# Altium PCB 电子钟v1.PcbDoc
Units mil, origin at the board's own origin, x right, y up, seen from the top; angles counter-clockwise.
Board outline 4440 x 3545 mil, 2 copper layers (Top Layer, Bottom Layer); 29 components, 52 nets, 185 pads, 3 vias.
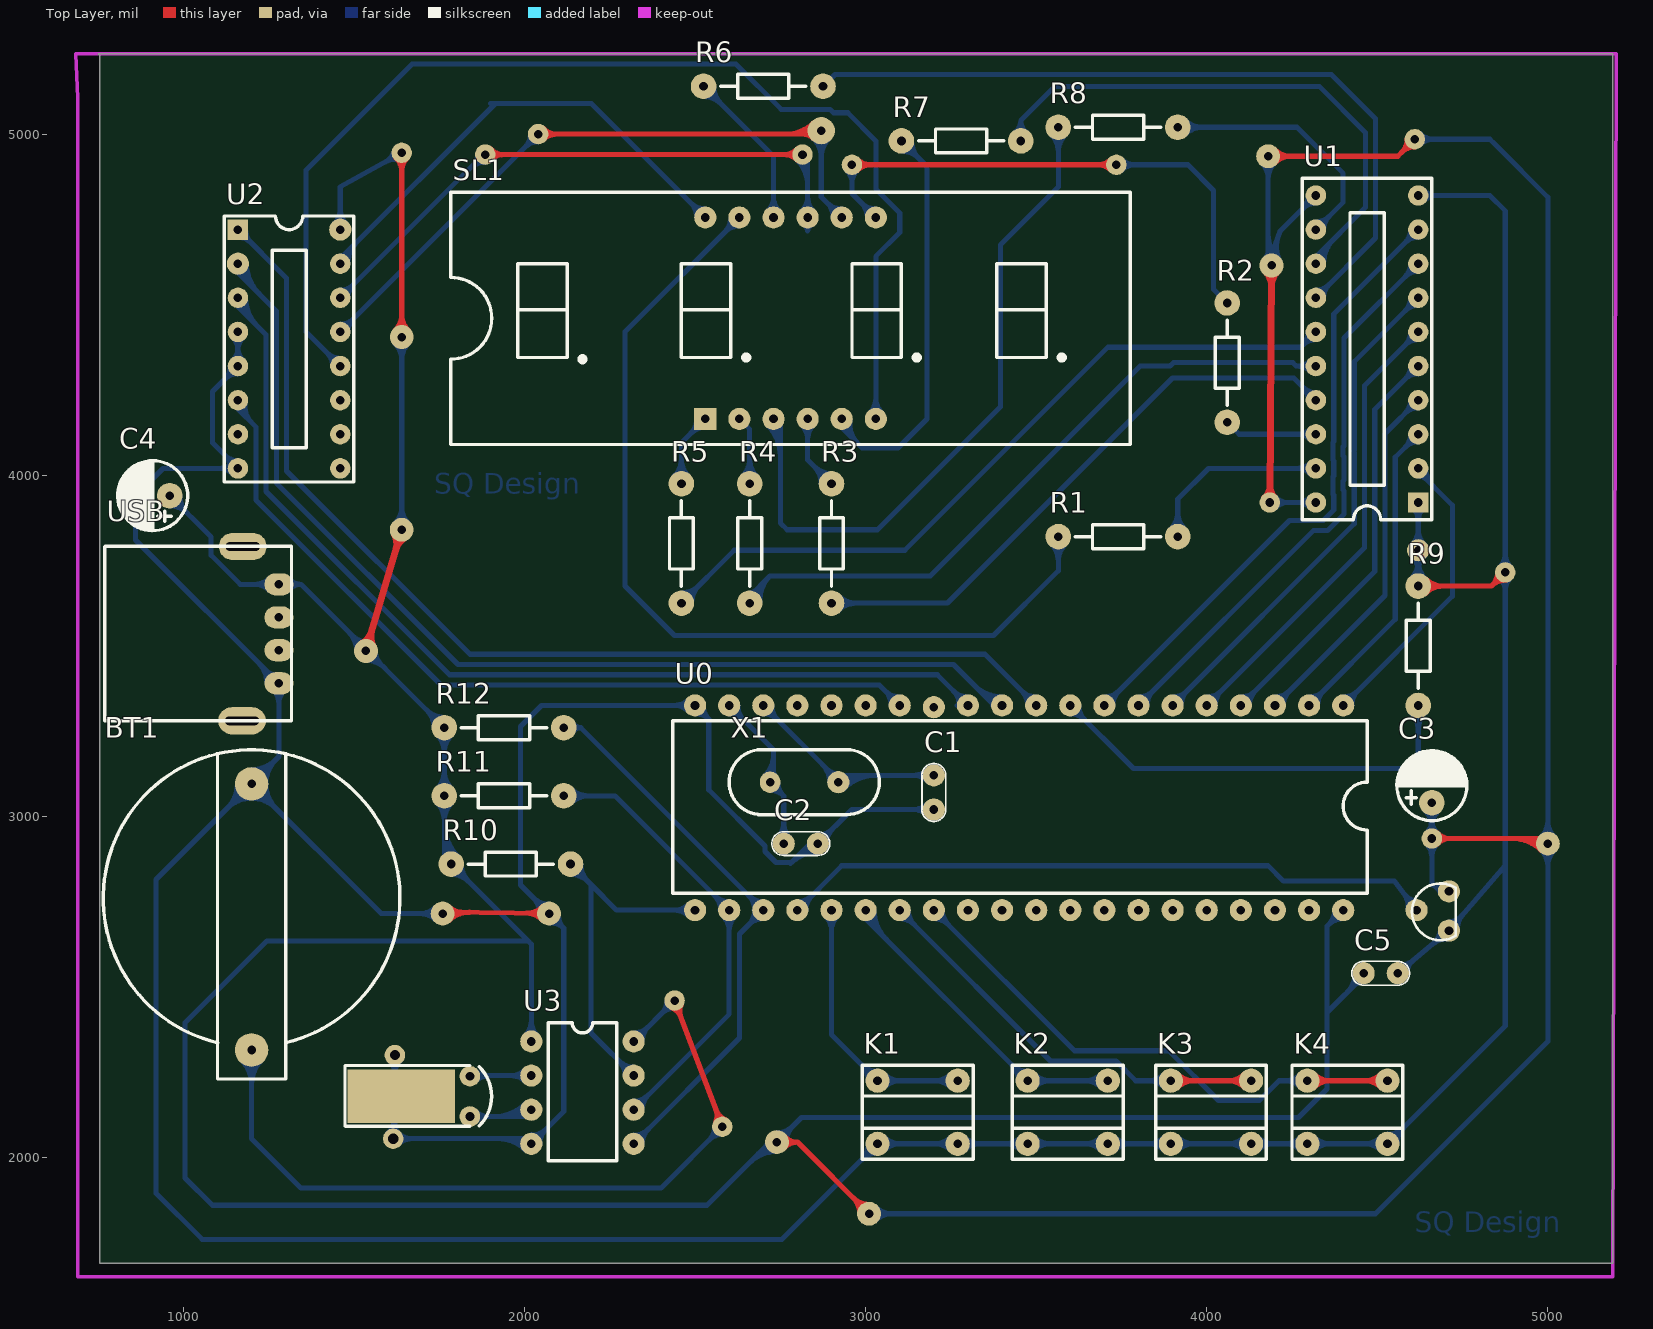
[diagram p0: Top Layer view]
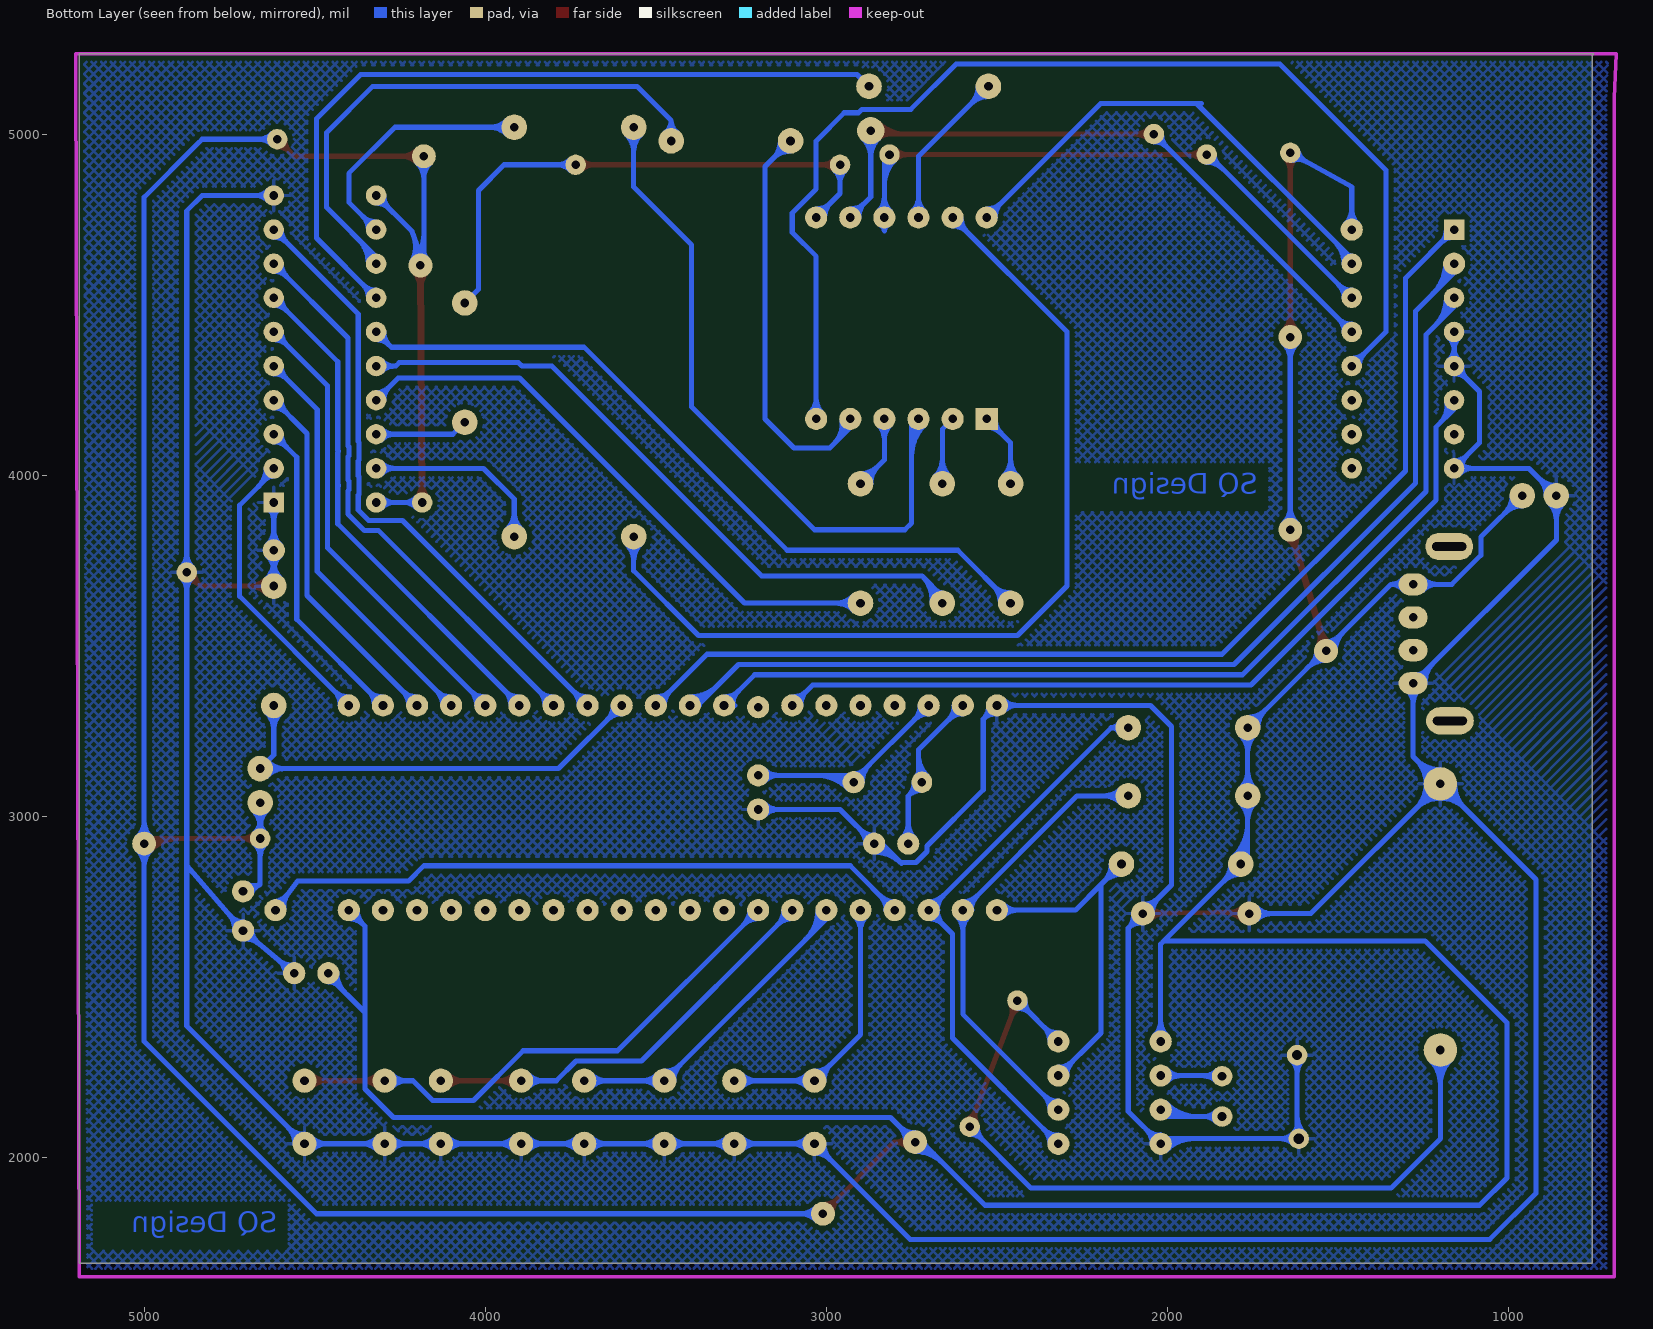
[diagram p1: Bottom Layer view, seen from below]

## Layer stack, top to bottom
Top Layer: signal copper 1.4
Dielectric: dielectric 12.6, FR-4, Dk 4.8
Bottom Layer: signal copper 1.4

## Board outline
750,5235 755,5230 755,1690 5190,1690 5190,5235 750,5235

## Design rules (kind name [scope] priority, off if disabled: settings)
Clearance [All] p1: gap=15
PolygonConnect [All] p1: connectstyle=Relief reliefconductorwidth=10 reliefentries=4 polygonreliefangle="90 Angle"
RoutingLayers [All] p1: top layer_v5=FALSE bottom layer_v5=TRUE
RoutingVias [All] p1: holewidth=28 width=50 viastyle="Through Hole" minholewidth=28 minwidth=50 maxholewidth=28 maxwidth=50
SilkscreenOverComponentPads [All] p1: minsilkscreentomaskgap=10
SolderMaskExpansion [All] p1: expansion=4
Width [All] p1: maxlimit=25 minlimit=8 preferedwidth=20
26 further rules are at their usual default settings.

## Components (designator, comment, footprint, x,y, rotation, side; value= is the part's Value field where it differs from the comment)
BT1 "3V" DCH_22 1200,2760 r270 top
C1 "47pf" 瓷片电容 3200,3020 r90 top
C2 "C" 瓷片电容 2860,2920 r180 top
C3 "CD" 电解电容（小型） 4660,3040 r90 top
C4 "CD" 电解电容（小型） 960,3940 r180 top
C5 "C" 瓷片电容 4560,2540 r180 top
K1 "switch-anniu" 6*6按钮开关 3150,2130 r0 top
K2 "switch-anniu" 6*6按钮开关 3590,2130 r0 top
K3 "switch-anniu" 6*6按钮开关 4010,2130 r0 top
K4 "switch-anniu" 6*6按钮开关 4410,2130 r0 top
R1 "R" 电阻-0.25W 3740,3820 r180 top
R2 "R" 电阻-0.25W 4060,4330 r90 top
R3 "R" 电阻-0.25W 2900,3800 r90 top
R4 "R" 电阻-0.25W 2660,3800 r90 top
R5 "R" 电阻-0.25W 2460,3800 r90 top
R6 "R" 电阻-0.25W 2700,5140 r180 top
R7 "R" 电阻-0.25W 3280,4980 r180 top
R8 "R" 电阻-0.25W 3740,5020 r180 top
R9 "R" 电阻-0.25W 4620,3500 r270 top
R10 "R" 电阻-0.25W 1960,2860 r180 top
R11 "R" 电阻-0.25W 1940,3060 r180 top
R12 "R" 电阻-0.25W 1940,3260 r180 top
SL1 "SMG(4Bit_A)" 4位数码管（19*50mm） 2780,4460 r0 top
U0 "MCU_51" DIP-40 4400,3325 r270 top
U1 "74HC573" DIP20插座 4620,3920 r180 top
U2 "74HC138" DIP16插座 1160,4720 r0 top
U3 "DS1302" DIP-8 2020,2340 r0 top
USB "USB" USB阴头 1280,3680 r180 top
X1 "XTAL" 无源晶体（2个脚） 2720,3100 r0 top

## Footprints (in the part's own frame and the unit in brackets; to place one, negate y for a bottom-side part, rotate by r counter-clockwise, add the part's x,y. Pads: shape width x height; smd on the part's side, far side on the other; paste and mask are expansions set on the pad)
4位数码管（19*50mm） [mil]
  rect 65x65 hole 25.37: 1(-250,-295)
  round 65 hole 25.37: 2(-150,-295) 3(-50,-295) 4(50,-295) 5(150,-295) 6(250,-295) 7(250,295.55) 8(150,295.55) 9(50,295.55) 10(-50,295.55) 11(-150,295.55) 12(-250,295.55)
  silkscreen extent -996,-370 996,370
6*6按钮开关 [mil]
  round 70.87 hole 25.24: 1(-115,95) 1(120,95) 2(-115,-90) 2(120,-90)
  silkscreen extent -160,-135 165,140
DCH_22 [mm]
  round 2.5 hole 0.644: 1(11.303,0) 2(-8.509,0)
  silkscreen extent -11.05,-11.05 13.46,11.05
DIP16插座 [mil]
  rect 60x60 hole 25: 1(0,0)
  round 65 hole 25: 2(0,-100) 16(300,0)
  round 60 hole 25: 3(0,-200) 4(0,-300) 5(0,-400) 6(0,-500) 7(0,-600) 8(0,-700) 9(300,-700) 10(300,-600) 11(300,-500) 12(300,-400) 13(300,-300) 14(300,-200) 15(300,-100)
  silkscreen extent -40,-740 340,40
DIP20插座 [mil]
  rect 60x60 hole 25: 1(0,0)
  round 60 hole 25: 2(0,-100) 3(0,-200) 4(0,-300) 5(0,-400) 6(0,-500) 7(0,-600) 8(0,-700) 9(0,-800) 10(0,-900) 11(300,-900) 12(300,-800) 13(300,-700) 14(300,-600) 15(300,-500) 16(300,-400) 17(300,-300) 18(300,-200) 19(300,-100) 20(300,0)
  silkscreen extent -40,-950 340,50
DIP-8 [mil]
  round 65 hole 25.43: 1(0,0) 2(0,-100) 3(0,-200) 4(0,-300) 5(300,-300) 6(300,-200) 7(300,-100) 8(300,0)
  silkscreen extent 50,-350 250,55
DIP-40 [mil]
  round 65 hole 25.43 paste+0: 1(0,0) 2(0,-100) 3(0,-200) 4(0,-300) 5(0,-400) 6(0,-500) 7(0,-600) 8(0,-700) 9(0,-800) 10(0,-900) 11(0,-1000) 12(0,-1100) 13(5,-1200) 14(0,-1300) 15(0,-1400) 16(0,-1500) 17(0,-1600) 18(0,-1700) 19(0,-1800) 20(0,-1900) 21(600,-1900) 22(600,-1800) 23(600,-1700) 24(600,-1600) 25(600,-1500) 26(600,-1400) 27(600,-1300) 28(600,-1200) 29(600,-1100) 30(600,-1000) 31(600,-900) 32(600,-800) 33(600,-700) 34(600,-600) 35(600,-500) 36(600,-400) 37(600,-300) 38(600,-200) 39(600,-100) 40(600,0)
  silkscreen extent 45,-1965 550,70
USB阴头 [mil]
  oval 140x80 hole 25 slot 100 at 0 deg: 0(106,-111) 0(108,400)
  oval 85x65 hole 25: 1(0,0) 2(0,97) 3(0,193) 4(0,290)
  silkscreen extent -37,-112 510,400
无源晶体（2个脚） [mil]
  oval 60.63x62.99 hole 25.5: 1(0,0)
  round 65 hole 25.5: 2(200,0)
  silkscreen extent -120,-95 320,95
瓷片电容 [mil]
  round 65 hole 25.5: 1(0,0) 2(100,0)
  silkscreen extent -35,-35 135,35
电解电容（小型） [mil]
  round 75 hole 25.37: 1(0,0) 2(100,0)
  silkscreen extent -52,-103 152,103
电阻-0.25W [mil]
  round 75 hole 25.5: 1(-175,0) 2(175,0)
  silkscreen extent -125,-35 125,35

## Part data
BT1: library part BATTER
C1: library part C

## Free pads (board coordinates)
  round 60 hole 30: 0(1620,2300) 1(1615,2055)
  round 60.24 hole 25.59: 1(1840,2120) 2(1840,2238.11)
  round 60 hole 25: 1(2040,5000) 3(2815,4940) 4(1885,4940) 6(3735,4910) 7(2960,4910) 10(1640,4945) 12(2580,2090) 13(2440,2460) 16(4875,3715) 18(4185,3920) 26(4610,4985) 31(4660,2935)
  oval 65.12x65.18 hole 25.5: 1(4710,2665) 2(4615,2725) 3(4710,2780)
  round 80 hole 25: 2(2870,5010)
  round 70 hole 25: 11(1640,3840) 20(1760,2715) 21(2072.03,2715) 24(2740,2045) 25(3010,1835) 29(4180,4935) 30(5000,2920)
  round 65 hole 25: 14(4620,3780)
  rect 314.96x157.48 smd: GND(1639.21,2179.05)

## Via types
v1: diameter 70, hole 25, Top Layer to Bottom Layer, 3 vias

## Nets (pads, with @x,y where several pads share a name; then routed paths per layer and width w, separated by ;. In a path a pad name is that pad's centre, name@x,y a point inside that pad or via, vN(x,y) a via of type N, cw(c..) or ccw(c..) an arc to the next point about the centre after c; other vN are vias at no path point)
GND: BT1.2 C1.1 C2.1 C4.2 C5.1 K1.2 K2.2 K3.2 K4.2 pad.0 pad.1@1615,2055 pad.1@4710,2665 pad.14 pad.16 pad.20 pad.21 R9.1 U0.20 U1.1 U1.10 U2.4 U2.5 U2.8 U3.4 USB.4 | length 21799.6
  Top Layer w15: pad.20@1765,2720 pad.21 ; pad.20@1768.69,2706.02 cw(c1801.75,2671.87) 1802.52,2719.39 ; pad.20@1779.13,2695.24 cw(c1837.37,2635.07) 1838.73,2718.8 ; pad.20@1779.76,2734.13 ccw(c1815,2768.24) 1814.2,2719.2 ; pad.21@2052.27,2695.87 ccw(c2004.56,2649.7) 2005.65,2716.08 ccw(c2006.73,2782.46) pad.21@2052.9,2734.76 ; R9.1 4835,3675 pad.16 ; R9.1@4641.21,3653.79 cw(c4692.43,3602.57) 4692.43,3675 cw(c4692.43,3747.43) R9.1@4641.21,3696.21 ; pad.16@4852.5,3715 cw(c4798.18,3715) 4836.59,3676.59 cw(c4875,3638.18) pad.16@4875,3692.5
  Bottom Layer w15: C4.2@838.79,3918.79 cw(c787.57,3867.57) 860,3867.57 cw(c932.43,3867.57) C4.2@881.21,3918.79 ; C4.2@860,3970 ccw(c860,4042.43) 911.21,3991.21 ccw(c962.43,3940) C4.2@890,3940 ; U2.8@1137.5,4020 ccw(c1083.18,4020) 1121.59,4058.41 ccw(c1160,4096.82) U2.8@1160,4042.5 ; U2.5@1137.5,4320 cw(c1083.18,4320) 1121.59,4281.59 cw(c1160,4243.18) U2.5@1160,4297.5 ; U2.8@1144.09,4004.09 ccw(c1105.68,3965.68) 1105.68,4020 ccw(c1105.68,4074.32) U2.8@1144.09,4035.91 ; U2.5@1144.09,4335.91 ccw(c1105.68,4374.32) 1160,4374.32 ccw(c1214.32,4374.32) U2.5@1175.91,4335.91 ; U2.4@1144.09,4404.09 cw(c1105.68,4365.68) 1160,4365.68 cw(c1214.32,4365.68) U2.4@1175.91,4404.09 ; BT1.2@1158.29,3095 cw(c1057.58,3095) 1128.79,3023.79 cw(c1200,2952.58) 1200,3053.29 cw(c1200,2952.58) 1271.21,3023.79 cw(c1342.42,3095) 1241.71,3095 cw(c1342.42,3095) 1271.21,3166.21 cw(c1200,3237.42) BT1.2@1200,3136.71 ; U2.4 U2.5 1085,4245 1085,4095 U2.8 940,4020 C4.2 860,3810 USB.4 1280,3175 BT1.2 ; BT1.2@1173.29,3095 cw(c1108.8,3095) 1154.4,3049.4 cw(c1200,3003.8) 1200,3068.29 cw(c1200,3003.8) 1245.6,3049.4 cw(c1291.2,3095) 1226.71,3095 cw(c1291.2,3095) 1245.6,3140.6 cw(c1200,3186.2) BT1.2@1200,3121.71 ; 1220.25,3449.75 cw(c1160.5,3390) USB.4@1245,3390 ; 1244.39,3425.61 ccw(c1270,3451.21) USB.4@1270,3415 ; 1245.86,3424.14 cw(c1211.72,3390) USB.4@1260,3390 ; USB.4@1262.32,3372.32 cw(c1219.64,3329.64) 1280,3329.64 cw(c1340.36,3329.64) USB.4@1297.68,3372.32 ; pad.1@1599.09,2070.91 ccw(c1548.61,2121.39) 1620,2121.39 ; pad.0@1604.09,2284.09 cw(c1565.68,2245.68) 1620,2245.68 cw(c1674.32,2245.68) pad.0@1635.91,2284.09 ; pad.1@1609.7,2060.3 ccw(c1584.82,2085.18) 1620,2085.18 ; 1620,2097.25 ccw(c1657.25,2097.25) 1630.91,2070.91 ccw(c1669.32,2109.32) 1669.32,2055 ccw(c1669.32,2000.68) pad.1@1630.91,2039.09 ; pad.0 1620,2060 1615,2055 2005,2055 U3.4 ; pad.20@1740.55,2695.55 ccw(c1693.61,2648.61) 1693.61,2715 ccw(c1693.61,2781.39) pad.20@1740.55,2734.45 ; pad.20 1580,2715 BT1.2 ; 1923.43,2055 cw(c1923.43,1943.43) U3.4@2002.32,2022.32 ; 1959.64,2055 cw(c1959.64,1979.64) U3.4@2012.93,2032.93 ; U3.4@2020,2065 ccw(c2020,2125.36) 2062.68,2082.68 ccw(c2105.36,2040) U3.4@2045,2040 ; U3.4@2020,2066.42 U3.4 ; pad.21@2044.53,2715 ccw(c1978.14,2715) 2025.08,2761.95 ccw(c2072.03,2808.89) pad.21@2072.03,2742.5 ; pad.21@2073.8,2687.56 cw(c2077.24,2634.28) 2115,2672.03 ; pad.21@2099.47,2713.23 ccw(c2152.75,2709.78) 2115,2672.03 ; U0.20@2482.32,3307.32 ccw(c2439.64,3264.64) 2439.64,3325 ccw(c2439.64,3385.36) U0.20@2482.32,3342.68 ; U0.20@2501.17,3300.03 cw(c2503.59,3248.59) 2540,3285 ; U0.20@2524.97,3323.83 ccw(c2576.41,3321.41) 2540,3285 ; 2779.39,2861.61 cw(c2860,2781) C2.1@2860,2895 ; 2805,2887.22 cw(c2860,2832.22) C2.1@2860,2910 ; C2.1@2860,2945 ccw(c2860,3005.36) 2902.68,2962.68 ccw(c2945.36,2920) C2.1@2885,2920 ; K1.2@3007.07,2040 cw(c2939.63,2040) 2987.32,1992.32 cw(c3035,1944.63) K1.2@3035,2012.07 ; K1.2@3054.75,2020.25 cw(c3102.44,1972.56) 3102.44,2040 cw(c3102.44,2107.44) K1.2@3054.75,2059.75 ; C1.1@3182.32,3002.32 ccw(c3139.64,2959.64) 3139.64,3020 ccw(c3139.64,3080.36) C1.1@3182.32,3037.68 ; C1.1 2960,3020 C2.1 2837.78,2920 2782.78,2865 2737.22,2865 2705,2897.22 2705,2912.78 2540,3077.78 2540,3285 ; K1.2@3250.25,2020.25 ccw(c3202.56,1972.56) 3202.56,2040 ccw(c3202.56,2107.44) K1.2@3250.25,2059.75 ; K1.2@3289.75,2020.25 cw(c3337.44,1972.56) 3337.44,2040 cw(c3337.44,2107.44) K1.2@3289.75,2059.75 ; K2.2@3455.25,2020.25 ccw(c3407.56,1972.56) 3407.56,2040 ccw(c3407.56,2107.44) K2.2@3455.25,2059.75 ; K2.2@3494.75,2020.25 cw(c3542.44,1972.56) 3542.44,2040 cw(c3542.44,2107.44) K2.2@3494.75,2059.75 ; K2.2@3690.25,2020.25 ccw(c3642.56,1972.56) 3642.56,2040 ccw(c3642.56,2107.44) K2.2@3690.25,2059.75 ; K2.2@3729.75,2020.25 cw(c3777.44,1972.56) 3777.44,2040 cw(c3777.44,2107.44) K2.2@3729.75,2059.75 ; K3.2@3875.25,2020.25 ccw(c3827.56,1972.56) 3827.56,2040 ccw(c3827.56,2107.44) K3.2@3875.25,2059.75 ; K3.2@3914.75,2020.25 cw(c3962.44,1972.56) 3962.44,2040 cw(c3962.44,2107.44) K3.2@3914.75,2059.75 ; K3.2@4110.25,2020.25 ccw(c4062.56,1972.56) 4062.56,2040 ccw(c4062.56,2107.44) K3.2@4110.25,2059.75 ; K3.2@4149.75,2020.25 cw(c4197.44,1972.56) 4197.44,2040 cw(c4197.44,2107.44) K3.2@4149.75,2059.75 ; K4.2@4275.25,2020.25 ccw(c4227.56,1972.56) 4227.56,2040 ccw(c4227.56,2107.44) K4.2@4275.25,2059.75 ; K4.2@4314.75,2020.25 cw(c4362.44,1972.56) 4362.44,2040 cw(c4362.44,2107.44) K4.2@4314.75,2059.75 ; K4.2@4510.25,2020.25 ccw(c4462.56,1972.56) 4462.56,2040 ccw(c4462.56,2107.44) K4.2@4510.25,2059.75 ; K4.2@4530,2067.93 ccw(c4530,2135.37) 4577.68,2087.68 ccw(c4625.37,2040) K4.2@4557.93,2040 ; C5.1@4555,2535 C5.1 4710,2665 4875,2855 ; C5.1@4562.26,2564.9 ccw(c4567.73,2625) 4606.37,2578.64 ccw(c4645,2532.27) C5.1@4584.9,2537.74 ; R9.1@4598.79,3696.21 ccw(c4547.57,3747.43) 4620,3747.43 ccw(c4692.43,3747.43) R9.1@4641.21,3696.21 ; pad.14@4602.32,3762.32 cw(c4559.64,3719.64) 4620,3719.64 cw(c4680.36,3719.64) pad.14@4637.68,3762.32 ; pad.14@4602.32,3797.68 ccw(c4559.64,3840.36) 4620,3840.36 ccw(c4680.36,3840.36) pad.14@4637.68,3797.68 ; U1.1@4604.09,3904.09 cw(c4565.68,3865.68) 4620,3865.68 cw(c4674.32,3865.68) U1.1@4635.91,3904.09 ; R9.1 U1.1 ; U1.10 4830,4820 4875,4775 pad.16 ; U1.10@4635.91,4804.09 cw(c4674.32,4765.68) 4674.32,4820 cw(c4674.32,4874.32) U1.10@4635.91,4835.91 ; 4663.46,2626.22 cw(c4702.25,2579.68) pad.1@4707.73,2640.01 ; 4663.55,2626.29 ccw(c4624.88,2672.71) pad.1@4685.04,2667.24 ; pad.1@4708.24,2690.03 ccw(c4703.98,2750.45) 4749.72,2710.73 ; pad.1@4735,2666.79 cw(c4795.28,2671.04) 4749.65,2710.66 ; pad.16@4859.09,3699.09 cw(c4820.68,3660.68) 4875,3660.68 cw(c4929.32,3660.68) pad.16@4890.91,3699.09 ; pad.16@4859.09,3730.91 ccw(c4820.68,3769.32) 4875,3769.32 ccw(c4929.32,3769.32) pad.16@4890.91,3730.91 ; pad.16@4875,3725.75 pad.16 ; BT1.2 920,2815 920,1895 1055,1760 2755,1760 3035,2040 3270,2040 3475,2040 3710,2040 3895,2040 4130,2040 4295,2040 4530,2040 4875,2385 4875,2855 ; U3.4 2115,2135 2115,2672.03 ; 2115,2672.03 pad.21 1988.51,2798.51 1988.51,3263.51 2050,3325 U0.20 2540,3285 ; 4875,2855 pad.16
NetBT1_1: BT1.1 pad.12 pad.13 U3.8 | length 3035.5
  Top Layer w15: pad.13@2430.75,2439.49 cw(c2408.42,2389.97) 2459.22,2409.2 cw(c2510.03,2428.42) pad.13@2460.51,2450.75 ; pad.13 pad.12 ; pad.12@2559.49,2099.25 ccw(c2509.97,2121.58) 2560.78,2140.8 ccw(c2611.58,2160.03) pad.12@2589.25,2110.51
  Bottom Layer w15: BT1.1@1170.5,2285.5 cw(c1099.3,2214.3) 1200,2214.3 cw(c1300.7,2214.3) BT1.1@1229.5,2285.5 ; BT1.1@1181.11,2296.11 cw(c1135.51,2250.51) 1200,2250.51 cw(c1264.49,2250.51) BT1.1@1218.89,2296.11 ; BT1.1 1200,2055 1345,1910 2400,1910 pad.12 ; U3.8 pad.13 ; U3.8@2320,2365 ccw(c2320,2425.36) 2362.68,2382.68 ccw(c2405.36,2340) U3.8@2345,2340 ; pad.13@2417.5,2460 cw(c2363.18,2460) 2401.59,2421.59 cw(c2440,2383.18) pad.13@2440,2437.5 ; pad.12@2557.5,2090 cw(c2503.18,2090) 2541.59,2051.59 cw(c2580,2013.18) pad.12@2580,2067.5
NetC1_2: C1.2 U0.18 X1.2 | length 1172.5
  Bottom Layer w15: U0.18@2700,3300 cw(c2700,3239.64) 2742.68,3282.32 cw(c2785.36,3325) U0.18@2725,3325 ; U0.18 X1.2@2922.5,3102.5 ; 2873.79,3151.21 cw(c2822.57,3100) X1.2@2895,3100 ; 2885.86,3139.14 ccw(c2920,3173.28) X1.2@2920,3125 ; 2899.39,3125.61 cw(c2873.79,3100) X1.2@2910,3100 ; X1.2@2916.46,3103.54 cw(c2956.21,3063.79) 2956.21,3120 ; X1.2 X1.2@2922.5,3102.5 ; X1.2@2927.07,3092.93 cw(c2992.43,3027.57) 2992.43,3120 ; X1.2@2930,3095 X1.2@2922.5,3102.5 ; X1.2@2930,3120 X1.2@2950,3100 ; X1.2@2937.68,3082.32 cw(c3028.64,2991.36) 3028.64,3120 ; C1.2@3182.32,3102.32 ccw(c3139.64,3059.64) 3139.64,3120 ccw(c3139.64,3180.36) C1.2@3182.32,3137.68 ; C1.2 2940,3120 X1.2@2922.5,3102.5
NetC2_2: C2.2 U0.19 X1.1 | length 879.1
  Bottom Layer w15: U0.19@2600,3300 cw(c2600,3239.64) 2642.68,3282.32 cw(c2685.36,3325) U0.19@2625,3325 ; U0.19 2730,3195 2730,3120 X1.1@2730,3100 ; X1.1@2703.87,3117.31 ccw(c2640.78,3180.4) 2730,3180.4 ; X1.1@2714.47,3106.71 ccw(c2676.99,3144.19) 2730,3144.19 ; X1.1 2760,3060 C2.2 ; X1.1@2720.15,3076 cw(c2720.53,3019.35) 2760.59,3059.41 ; 2730,3132.12 ccw(c2750.94,3132.12) X1.1@2736.13,3117.31 ; C2.2@2742.32,2937.68 ccw(c2699.64,2980.36) 2760,2980.36 ccw(c2820.36,2980.36) C2.2@2777.68,2937.68 ; X1.1@2742.81,3098.82 ccw(c2795.04,3098.82) 2758.11,3061.89
NetC3_2: C3.2 R9.2 U0.9 | length 1660.5
  Bottom Layer w15: U0.9@3600,3300 cw(c3600,3239.64) 3642.68,3282.32 cw(c3685.36,3325) U0.9@3625,3325 ; U0.9 3785,3140 C3.2 4620,3180 R9.2 ; R9.2@4598.79,3303.79 cw(c4547.57,3252.57) 4620,3252.57 cw(c4692.43,3252.57) R9.2@4641.21,3303.79 ; C3.2@4638.79,3118.79 ccw(c4587.57,3067.57) 4587.57,3140 ccw(c4587.57,3212.43) C3.2@4638.79,3161.21
NetR1_1: R1.1 U1.19 | length 766.4
  Bottom Layer w15: R1.1@3893.79,3841.21 ccw(c3842.57,3892.43) 3915,3892.43 ccw(c3987.43,3892.43) R1.1@3936.21,3841.21 ; R1.1 3915,3930 4005,4020 4230,4020 ; 4215,4020 4230,4020 ; U1.19@4304.09,4004.09 ccw(c4265.68,3965.68) 4265.68,4020 ccw(c4265.68,4074.32) U1.19@4304.09,4035.91 ; U1.19 4230,4020
NetR1_2: R1.2 SL1.11 | length 2936.6
  Bottom Layer w15: SL1.11@2605,4755.55 cw(c2544.64,4755.55) 2587.32,4712.87 cw(c2630,4670.2) SL1.11@2630,4730.55 ; SL1.11 2295,4420.55 2295,3675 2440,3530 3375,3530 3565,3720 R1.2 ; R1.2@3543.79,3798.79 cw(c3492.57,3747.57) 3565,3747.57 cw(c3637.43,3747.57) R1.2@3586.21,3798.79
NetR2_1: R2.1 U1.18 | length 359.8
  Bottom Layer w15: R2.1 4095,4120 U1.18 ; U1.18@4304.09,4104.09 ccw(c4265.68,4065.68) 4265.68,4120 ccw(c4265.68,4174.32) U1.18@4304.09,4135.91
NetR2_2: pad.6 pad.7 R2.2 SL1.7 | length 2072.2
  Top Layer w15: pad.7 pad.6 ; pad.7@2975.91,4894.09 cw(c3014.32,4855.68) 3014.32,4910 cw(c3014.32,4964.32) pad.7@2975.91,4925.91 ; pad.6@3719.09,4894.09 ccw(c3680.68,4855.68) 3680.68,4910 ccw(c3680.68,4964.32) pad.6@3719.09,4925.91
  Bottom Layer w15: pad.7@2944.09,4894.09 cw(c2905.68,4855.68) 2960,4855.68 cw(c3014.32,4855.68) pad.7@2975.91,4894.09 ; pad.7@2960,4925 2960,4825.55 SL1.7 ; SL1.7@3005,4755.55 ccw(c2944.64,4755.55) 2987.32,4798.23 ccw(c3030,4840.91) SL1.7@3030,4780.55 ; pad.6 3945,4910 4020,4835 4020,4545 R2.2 ; pad.6@3750.91,4894.09 cw(c3789.32,4855.68) 3789.32,4910 cw(c3789.32,4964.32) pad.6@3750.91,4925.91
NetR3_1: R3.1 U1.17 | length 1919.4
  Bottom Layer w15: R3.1 3240,3625 3900,4285 4255,4285 U1.17 ; R3.1@2921.21,3603.79 cw(c2972.43,3552.57) 2972.43,3625 cw(c2972.43,3697.43) R3.1@2921.21,3646.21 ; U1.17@4297.5,4220 ccw(c4243.18,4220) 4281.59,4258.41 ccw(c4320,4296.82) U1.17@4320,4242.5
NetR3_2: R3.2 SL1.4 | length 427.6
  Bottom Layer w15: SL1.4@2812.32,4147.32 cw(c2769.64,4104.64) 2830,4104.64 cw(c2890.36,4104.64) SL1.4@2847.68,4147.32 ; SL1.4 2830,4045 R3.2 ; R3.2@2870,3975 ccw(c2797.57,3975) 2848.79,4026.21 ccw(c2900,4077.43) R3.2@2900,4005
NetR4_1: R4.1 U1.16 | length 2219.7
  Bottom Layer w15: R4.1 2660,3645 2720,3705 ; R4.1@2660,3655 ccw(c2660,3679.14) 2677.07,3662.07 ; R4.1@2674.98,3625.8 cw(c2747.72,3629.7) 2696.21,3681.21 ; R4.1@2689.96,3626.61 cw(c2792.87,3632.12) 2720,3705 ; U1.16@4304.09,4304.09 ccw(c4265.68,4265.68) 4265.68,4320 ccw(c4265.68,4374.32) U1.16@4304.09,4335.91 ; U1.16 4262.43,4320 4252.43,4330 3902.57,4330 3892.57,4320 3805,4320 3190,3705 2720,3705
NetR4_2: R4.2 SL1.2 | length 316.2
  Bottom Layer w15: SL1.2 2660,4135 R4.2 ; R4.2@2638.79,3996.21 ccw(c2587.57,4047.43) 2660,4047.43 ccw(c2732.43,4047.43) R4.2@2681.21,3996.21
NetR5_1: R5.1 U1.15 | length 2388.4
  Bottom Layer w15: R5.1 2615,3780 3115,3780 3710,4375 4275,4375 U1.15 ; R5.1@2460,3655 ccw(c2460,3727.43) 2511.21,3676.21 ccw(c2562.43,3625) R5.1@2490,3625 ; U1.15@4297.5,4420 cw(c4243.18,4420) 4281.59,4381.59 cw(c4320,4343.18) U1.15@4320,4397.5
NetR5_2: R5.2 SL1.1 | length 437.6
  Bottom Layer w15: R5.2@2438.79,3996.21 ccw(c2387.57,4047.43) 2460,4047.43 ccw(c2532.43,4047.43) R5.2@2481.21,3996.21 ; R5.2 2460,4095 SL1.1 ; SL1.1@2505,4165 cw(c2444.64,4165) 2487.32,4122.32 cw(c2530,4079.64) SL1.1@2530,4140
  Bottom Layer w20: SL1.1 SL1.1@2530,4175
NetR6_1: R6.1 U1.14 | length 2371.2
  Bottom Layer w15: R6.1 2910,5175 4365,5175 4495,5045 4495,4695 U1.14 ; U1.14@4320,4542.5 ccw(c4320,4596.82) 4358.41,4558.41 ccw(c4396.82,4520) U1.14@4342.5,4520
NetR6_2: R6.2 SL1.10 | length 678.5
  Bottom Layer w15: R6.2@2525,5110 cw(c2525,5037.57) 2576.21,5088.79 cw(c2627.43,5140) R6.2@2555,5140 ; R6.2 2730,4935 SL1.10 SL1.10@2729.45,4755.55 ; SL1.10@2712.32,4773.23 ccw(c2669.64,4815.91) 2730,4815.91 ccw(c2790.36,4815.91) SL1.10@2747.68,4773.23
NetR7_1: R7.1 U1.13 | length 1841.7
  Bottom Layer w15: R7.1@3437,5004 ccw(c3410.01,5040) 3455,5040 ; R7.1 3455,5040 ; R7.1@3473,5004 cw(c3499.99,5040) 3455,5040 ; 3480,5065 3489.27,5074.27 ; U1.13 4320,4640 4465,4785 4465,5005 4330,5140 3555,5140 3489.27,5074.27 ; U1.13@4327.5,4620 cw(c4393.89,4620) 4346.95,4666.95 ; U1.13@4342.5,4620 cw(c4445.1,4620) 4372.55,4692.55 ; 3455,5040 3489.27,5074.27
NetR7_2: R7.2 SL1.5 | length 1424.7
  Bottom Layer w15: SL1.5 2930,4140 2990,4080 3095,4080 3180,4165 3180,4905 R7.2 ; SL1.5@2939.89,4163.54 ccw(c2997.8,4154.98) 2956.41,4113.59 ; SL1.5@2954.73,4161.35 ccw(c3034.55,4149.56) 2977.5,4092.5 ; R7.2@3105,4950 cw(c3105,4877.57) 3156.21,4928.79 cw(c3207.43,4980) R7.2@3135,4980
NetR8_1: R8.1 U1.12 | length 938.1
  Bottom Layer w15: R8.1 4265,5020 4400,4885 4400,4800 U1.12 ; R8.1@3936.21,4998.79 cw(c3987.43,4947.57) 3987.43,5020 cw(c3987.43,5092.43) R8.1@3936.21,5041.21 ; U1.12@4320,4742.5 ccw(c4320,4796.82) 4358.41,4758.41 ccw(c4396.82,4720) U1.12@4342.5,4720
NetR8_2: R8.2 SL1.3 | length 2337.6
  Bottom Layer w15: SL1.3@2712.32,4147.32 cw(c2621.36,4056.36) 2750,4056.36 ; SL1.3@2722.93,4157.93 cw(c2657.57,4092.57) 2750,4092.57 ; SL1.3 2750,4145 2750,3860 2770,3840 3035,3840 3395,4200 3395,4675 3565,4845 R8.2 ; SL1.3@2733.54,4168.54 cw(c2693.79,4128.79) 2750,4128.79 ; R8.2@3543.79,4998.79 cw(c3492.57,4947.57) 3565,4947.57 cw(c3637.43,4947.57) R8.2@3586.21,4998.79
NetSL1_6: SL1.6 U2.12 | length 3561.1
  Bottom Layer w15: U2.12@1437.5,4320 ccw(c1383.18,4320) 1421.59,4358.41 ccw(c1460,4396.82) U2.12@1460,4342.5 ; U2.12 1360,4420 1360,4895 1670,5205 2620,5205 2752.5,5072.5 2895.89,5072.5 2905.89,5062.5 2947.5,5062.5 3030,4980 3030,4838.97 3100,4768.97 3100,4711.65 3030,4641.65 SL1.6 ; SL1.6@3012.32,4182.68 ccw(c2969.64,4225.36) 3030,4225.36 ccw(c3090.36,4225.36) SL1.6@3047.68,4182.68
NetSL1_8: pad.1@2040,5000 pad.2@2870,5010 SL1.8 U2.13 | length 2653.2
  Top Layer w15: pad.1@2040,5000 pad.2@2860,5000 ; pad.1@2055.91,4984.09 cw(c2094.32,4945.68) 2094.32,5000 cw(c2094.32,5054.32) pad.1@2055.91,5015.91 ; 2767.4,5000 ccw(c2767.4,5112.6) pad.2@2847.02,5032.98 ; 2803.61,5000 ccw(c2803.61,5076.39) pad.2@2857.63,5022.37 ; 2815.68,5000 cw(c2815.68,4955.68) pad.2@2847.02,4987.02
  Bottom Layer w15: U2.13 pad.1@2040,5000 ; U2.13@1460,4442.5 ccw(c1460,4496.82) 1498.41,4458.41 ccw(c1536.82,4420) U2.13@1482.5,4420 ; pad.1@2017.5,5000 cw(c1963.18,5000) 2001.59,4961.59 cw(c2040,4923.18) pad.1@2040,4977.5 ; pad.2@2847.02,4987.02 cw(c2791.54,4931.54) 2870,4931.54 cw(c2948.46,4931.54) pad.2@2892.98,4987.02 ; pad.2@2857.63,4997.63 cw(c2827.75,4967.75) 2870,4967.75 cw(c2912.25,4967.75) pad.2@2882.37,4997.63 ; pad.2@2870,5020 2870,4815.55 SL1.8 ; SL1.8@2905,4755.55 ccw(c2844.64,4755.55) 2887.32,4798.23 ccw(c2930,4840.91) SL1.8@2930,4780.55
NetSL1_9: pad.3@2815,4940 pad.4 SL1.9 U2.14 | length 2358.3
  Top Layer w15: pad.4 pad.3@2815,4940 ; pad.4@1900.91,4924.09 cw(c1939.32,4885.68) 1939.32,4940 cw(c1939.32,4994.32) pad.4@1900.91,4955.91 ; pad.3@2799.09,4924.09 ccw(c2760.68,4885.68) 2760.68,4940 ccw(c2760.68,4994.32) pad.3@2799.09,4955.91
  Bottom Layer w15: U2.14 pad.4@1875,4935 ; U2.14@1460,4542.5 ccw(c1460,4596.82) 1498.41,4558.41 ccw(c1536.82,4520) U2.14@1482.5,4520 ; 1838.05,4898.05 cw(c1885,4851.11) pad.4@1885,4917.5 ; 1850.13,4910.13 ccw(c1820.25,4940) pad.4@1862.5,4940 ; pad.3@2799.09,4924.09 cw(c2724.47,4849.47) 2830,4849.47 ; pad.3@2809.7,4934.7 cw(c2760.68,4885.68) 2830,4885.68 ; SL1.9@2812.32,4773.23 ccw(c2769.64,4815.91) 2830,4815.91 ccw(c2890.36,4815.91) SL1.9@2847.68,4773.23 ; SL1.9@2819.05,4733.08 cw(c2810.5,4715.55) 2830,4715.55 ; pad.3@2830,4940 SL1.9 2830,4715.55 ; SL1.9@2840.95,4733.08 ccw(c2849.5,4715.55) 2830,4715.55
NetSL1_12: SL1.12 U2.15 | length 1649.8
  Bottom Layer w15: U2.15 1460,4635 1915,5090 ; U2.15@1460,4642.5 ccw(c1460,4660.61) 1472.8,4647.8 ; U2.15@1467.5,4620 cw(c1521.82,4620) 1483.41,4658.41 ; U2.15@1482.5,4620 cw(c1573.03,4620) 1509.02,4684.02 ; 1900,5090 1915,5090 ; SL1.12@2505,4755.55 ccw(c2444.64,4755.55) 2487.32,4798.23 ccw(c2530,4840.91) SL1.12@2530,4780.55 ; SL1.12 2195.55,5090 1915,5090
NetU3_2: pad.2@1840,2238.11 U3.2 | length 361.4
  Bottom Layer w15: pad.2@1840,2238.11 1841.89,2240 U3.2 ; pad.2@1856,2222.11 cw(c1899.18,2178.93) 1899.18,2240 ; pad.2@1856,2254.11 ccw(c1890.05,2288.16) 1890.05,2240 ; U3.2@2002.32,2222.32 ccw(c1959.64,2179.64) 1959.64,2240 ccw(c1959.64,2300.36) U3.2@2002.32,2257.68
NetU3_3: pad.1@1840,2120 U3.3 | length 491.8
  Bottom Layer w15: pad.1@1840,2120 2000,2120 U3.3 ; pad.1@1856,2104 cw(c1894.61,2065.39) 1894.61,2120 cw(c1894.61,2174.61) pad.1@1856,2136 ; 1911.36,2120 ccw(c1911.36,2248.64) U3.3@2002.32,2157.68 ; 1947.57,2120 ccw(c1947.57,2212.43) U3.3@2012.93,2147.07 ; 1983.79,2120 ccw(c1983.79,2176.21) U3.3@2023.54,2136.46
P1_0: U0.1 U1.2 | length 1078.8
  Bottom Layer w15: U0.1 4720,3645 4720,3911.82 4620,4011.82 U1.2 ; U0.1@4400,3350 ccw(c4400,3410.36) 4442.68,3367.68 ccw(c4485.36,3325) U0.1@4425,3325 ; U1.2@4620,3997.5 cw(c4620,3962.93) 4644.45,3987.37 ; U1.2@4627.5,4020 ccw(c4665.35,4020) 4638.59,3993.23 ; U1.2@4642.5,4020 ccw(c4716.57,4020) 4664.19,3967.63
P1_1: U0.2 U1.3 | length 1107.7
  Bottom Layer w15: U0.2 4552.5,3577.5 4552.5,4052.5 U1.3 ; U0.2@4300,3350 ccw(c4300,3410.36) 4342.68,3367.68 ccw(c4385.36,3325) U0.2@4325,3325 ; U1.3@4597.5,4120 cw(c4543.18,4120) 4581.59,4081.59 cw(c4620,4043.18) U1.3@4620,4097.5
P1_2: U0.3 U1.4 | length 1249.1
  Bottom Layer w15: U0.3 4522.5,3647.5 4522.5,4122.5 U1.4 ; U0.3@4200,3350 ccw(c4200,3410.36) 4242.68,3367.68 ccw(c4285.36,3325) U0.3@4225,3325 ; U1.4@4597.5,4220 cw(c4543.18,4220) 4581.59,4181.59 cw(c4620,4143.18) U1.4@4620,4197.5
P1_3: U0.4 U1.5 | length 1390.5
  Bottom Layer w15: U0.4 4492.5,3717.5 4492.5,4192.5 U1.5 ; U0.4@4100,3350 ccw(c4100,3410.36) 4142.68,3367.68 ccw(c4185.36,3325) U0.4@4125,3325 ; U1.5@4597.5,4320 cw(c4543.18,4320) 4581.59,4281.59 cw(c4620,4243.18) U1.5@4620,4297.5
P1_4: U0.5 U1.6 | length 1531.9
  Bottom Layer w15: U0.5 4462.5,3787.5 4462.5,4262.5 U1.6 ; U0.5@4000,3350 ccw(c4000,3410.36) 4042.68,3367.68 ccw(c4085.36,3325) U0.5@4025,3325 ; U1.6@4597.5,4420 cw(c4543.18,4420) 4581.59,4381.59 cw(c4620,4343.18) U1.6@4620,4397.5
P1_5: U0.6 U1.7 | length 1677.5
  Bottom Layer w15: U0.6 4432.5,3857.5 4432.5,3966.6 4430,3969.1 4430,3970.9 4432.5,3973.4 4432.5,4066.6 4430,4069.1 4430,4070.9 4432.5,4073.4 4432.5,4332.5 U1.7 ; U0.6@3900,3350 ccw(c3900,3410.36) 3942.68,3367.68 ccw(c3985.36,3325) U0.6@3925,3325 ; U1.7@4597.5,4520 cw(c4543.18,4520) 4581.59,4481.59 cw(c4620,4443.18) U1.7@4620,4497.5
P1_6: U0.7 U1.8 | length 1843.3
  Bottom Layer w15: U0.7 4312.5,3837.5 4354.17,3837.5 4402.5,3885.83 4402.5,3954.17 4400,3956.67 4400,3983.33 4402.5,3985.83 4402.5,4054.17 4400,4056.67 4400,4083.33 4402.5,4085.83 4402.5,4402.5 U1.8 ; U0.7@3800,3350 ccw(c3800,3410.36) 3842.68,3367.68 ccw(c3885.36,3325) U0.7@3825,3325 ; U1.8@4597.5,4620 cw(c4543.18,4620) 4581.59,4581.59 cw(c4620,4543.18) U1.8@4620,4597.5
P1_7: U0.8 U1.9 | length 2018.5
  Bottom Layer w15: U0.8 4242.5,3867.5 4341.75,3867.5 4372.5,3898.25 4372.5,3941.75 4370,3944.25 4370,3995.75 4372.5,3998.25 4372.5,4041.75 4370,4044.25 4370,4095.75 4372.5,4098.25 4372.5,4472.5 U1.9 ; U0.8@3700,3350 ccw(c3700,3410.36) 3742.68,3367.68 ccw(c3785.36,3325) U0.8@3725,3325 ; U1.9@4597.5,4720 cw(c4543.18,4720) 4581.59,4681.59 cw(c4620,4643.18) U1.9@4620,4697.5
P2_0: R10.1 U0.21 U3.7 | length 1336.1
  Bottom Layer w15: R10.1@2135,2830 cw(c2135,2757.57) 2186.21,2808.79 cw(c2237.43,2860) R10.1@2165,2860 ; R10.1 2195,2800 ; U3.7@2295,2240 ccw(c2234.64,2240) 2277.32,2282.68 ccw(c2320,2325.36) U3.7@2320,2265 ; U3.7 2195,2365 2195,2800 ; U0.21@2482.32,2707.32 ccw(c2439.64,2664.64) 2439.64,2725 ccw(c2439.64,2785.36) U0.21@2482.32,2742.68 ; U0.21 2270,2725 2195,2800
P2_1: R11.1 U0.22 U3.6 | length 1750.2
  Bottom Layer w15: R11.1 2265,3060 U0.22 ; R11.1@2136.21,3038.79 cw(c2187.43,2987.57) 2187.43,3060 cw(c2187.43,3132.43) R11.1@2136.21,3081.21 ; U3.6 2600,2420 U0.22 ; U3.6@2320,2165 ccw(c2320,2225.36) 2362.68,2182.68 ccw(c2405.36,2140) U3.6@2345,2140 ; U0.22@2572.76,2725 U0.22 ; U0.22@2575,2725 ccw(c2514.64,2725) 2557.32,2767.68 ccw(c2600,2810.36) U0.22@2600,2750 ; U0.22@2582.32,2707.32 cw(c2539.64,2664.64) 2600,2664.64 cw(c2660.36,2664.64) U0.22@2617.68,2707.32
P2_2: R12.1 U0.23 U3.5 | length 2018.3
  Bottom Layer w15: R12.1 2165,3260 ; R12.1@2141.47,3245.88 cw(c2165,3233.34) 2165,3260 ; R12.1@2141.47,3274.12 ccw(c2165,3286.66) 2165,3260 ; U3.5 2630,2350 2630,2655 U0.23 ; U3.5@2320,2065 ccw(c2320,2125.36) 2362.68,2082.68 ccw(c2405.36,2040) U3.5@2345,2040 ; U0.23@2672.76,2725 U0.23 ; U0.23@2700,2700 ccw(c2700,2639.64) 2657.32,2682.32 ccw(c2614.64,2725) 2675,2725 ccw(c2614.64,2725) 2657.32,2767.68 ccw(c2700,2810.36) U0.23@2700,2750 ; 2165,3260 U0.23
P2_3: pad.2@4615,2725 U0.24 | length 2146.6
  Bottom Layer w15: U0.24@2800,2750 ccw(c2800,2810.36) 2842.68,2767.68 ccw(c2885.36,2725) U0.24@2825,2725 ; U0.24@2827.24,2725 U0.24 2930,2855 4180,2855 4225,2810 4550,2810 pad.2@4615,2725 ; 4578.21,2773.11 ccw(c4626.32,2809.9) pad.2@4618.31,2749.87 ; 4578.26,2773.04 cw(c4530.26,2736.33) pad.2@4590.16,2728.34
P2_4: K1.1 U0.25 | length 1203.5
  Bottom Layer w15: U0.25@2882.32,2707.32 cw(c2839.64,2664.64) 2900,2664.64 cw(c2960.36,2664.64) U0.25@2917.68,2707.32 ; U0.25 2900,2360 3035,2225 K1.1@3270,2225 ; K1.1@3007.07,2225 ccw(c2939.63,2225) 2987.32,2272.68 ccw(c3035,2320.37) K1.1@3035,2252.93 ; K1.1@3054.75,2205.25 cw(c3102.44,2157.56) 3102.44,2225 cw(c3102.44,2292.44) K1.1@3054.75,2244.75 ; K1.1@3250.25,2205.25 ccw(c3202.56,2157.56) 3202.56,2225 ccw(c3202.56,2292.44) K1.1@3250.25,2244.75
P2_5: K2.1 U0.26 | length 1448.6
  Bottom Layer w15: U0.26@2995,2725 ccw(c3043.28,2725) 3009.14,2690.86 ; U0.26 3000,2700 3475,2225 K2.1@3710,2225 ; U0.26@3010,2725 ccw(c3094.5,2725) 3034.75,2665.25 ; U0.26@3025,2725 ccw(c3145.71,2725) 3060.36,2639.64 ; K2.1@3447.07,2225 ccw(c3379.63,2225) 3427.32,2272.68 ccw(c3475,2320.37) K2.1@3475,2252.93 ; K2.1@3494.75,2205.25 cw(c3542.44,2157.56) 3542.44,2225 cw(c3542.44,2292.44) K2.1@3494.75,2244.75 ; K2.1@3690.25,2205.25 ccw(c3642.56,2157.56) 3642.56,2225 ccw(c3642.56,2292.44) K2.1@3690.25,2244.75
P2_6: K3.1 U0.27 | length 1649.7
  Top Layer w15: K3.1@3895,2225 K3.1@4130,2225 ; K3.1@3914.75,2205.25 cw(c3962.44,2157.56) 3962.44,2225 cw(c3962.44,2292.44) K3.1@3914.75,2244.75 ; K3.1@4110.25,2205.25 ccw(c4062.56,2157.56) 4062.56,2225 ccw(c4062.56,2292.44) K3.1@4110.25,2244.75
  Bottom Layer w15: U0.27@3100,2700 cw(c3100,2639.64) 3142.68,2682.32 cw(c3185.36,2725) U0.27@3125,2725 ; U0.27 3542.07,2282.93 3734,2282.93 3791.93,2225 K3.1@3895,2225 ; K3.1@3875.25,2205.25 ccw(c3827.56,2157.56) 3827.56,2225 ccw(c3827.56,2292.44) K3.1@3875.25,2244.75
P2_7: K4.1 U0.28 | length 1997.7
  Top Layer w15: K4.1@4295,2225 K4.1@4530,2225 ; K4.1@4314.75,2205.25 cw(c4362.44,2157.56) 4362.44,2225 cw(c4362.44,2292.44) K4.1@4314.75,2244.75 ; K4.1@4510.25,2205.25 ccw(c4462.56,2157.56) 4462.56,2225 ccw(c4462.56,2292.44) K4.1@4510.25,2244.75
  Bottom Layer w15: U0.28@3200,2700 cw(c3200,2639.64) 3242.68,2682.32 cw(c3285.36,2725) U0.28@3225,2725 ; U0.28 3612.07,2312.93 3889,2312.93 4034.86,2167.07 4154,2167.07 4211.93,2225 K4.1@4295,2225 ; K4.1@4275.25,2205.25 ccw(c4227.56,2157.56) 4227.56,2225 ccw(c4227.56,2292.44) K4.1@4275.25,2244.75
P3_0: U0.10 U2.1 | length 3428.9
  Bottom Layer w15: U2.1@1160,4697.5 cw(c1160,4643.18) 1198.41,4681.59 cw(c1236.82,4720) U2.1@1182.5,4720 ; U2.1 1302.5,4577.5 1302.5,4012.5 1840,3475 3350,3475 U0.10 ; U0.10@3475,3325 ccw(c3414.64,3325) 3457.32,3367.68 ccw(c3500,3410.36) U0.10@3500,3350
P3_1: U0.11 U2.2 | length 3445.9
  Bottom Layer w15: U2.2@1155,4620 ccw(c1205.1,4620) 1169.68,4584.57 ; U2.2 1160,4594.25 1272.5,4481.75 1272.5,3977.5 1805,3445 3257.78,3445 U0.11@3377.78,3325 ; U2.2@1170,4620 ccw(c1256.32,4620) 1195.28,4558.96 ; U2.2@1185,4620 ccw(c1307.53,4620) 1220.89,4533.36 ; 3319.39,3383.39 ccw(c3400,3464) U0.11@3400,3350 ; 3345,3357.78 ccw(c3400,3412.78) U0.11@3400,3335 ; U0.11@3372.76,3325 U0.11@3377.78,3325 ; U0.11 U0.11@3377.78,3325
P3_2: U0.12 U2.3 | length 3235.3
  Bottom Layer w15: U2.3@1152.5,4520 ccw(c1196.57,4520) 1165.41,4488.84 ; U2.3 1160,4494.25 1242.5,4411.75 1242.5,3952.5 1780,3415 3210,3415 U0.12 U0.12@3267.76,3325 ; U2.3@1167.5,4520 ccw(c1247.78,4520) 1191.01,4463.23 ; U2.3@1182.5,4520 ccw(c1299,4520) 1216.62,4437.63 ; U0.12@3275,3325 ccw(c3214.64,3325) 3257.32,3367.68 ccw(c3300,3410.36) U0.12@3300,3350
P3_3: U0.13
P3_4: U0.14 U2.6 | length 2660.1
  Bottom Layer w15: U2.6 1160,4194.25 1212.5,4141.75 1212.5,3927.5 1755,3385 3040,3385 U0.14 ; U2.6@1167.32,4218.38 ccw(c1214.3,4207.99) 1180.28,4173.97 ; U2.6@1181.97,4215.14 ccw(c1245.97,4200.98) 1199.62,4154.63 ; U0.14@3075,3325 ccw(c3014.64,3325) 3057.32,3367.68 ccw(c3100,3410.36) U0.14@3100,3350
P3_5: U0.15
P3_6: U0.16
P3_7: U0.17
VCC: C3.1 C4.1 C5.2 pad.3@4710,2780 pad.10 pad.11 pad.18 pad.24 pad.25 pad.26 pad.29 pad.30 pad.31 R10.2 R11.2 R12.2 U0.40 U1.11 U1.20 U2.16 U3.1 USB.1 | length 22659.2
  Top Layer w15: v1@1620.55,4424.45 ccw(c1573.61,4471.39) 1640,4471.39 ccw(c1706.39,4471.39) v1@1659.45,4424.45 ; pad.10@1624.09,4929.09 cw(c1585.68,4890.68) 1640,4890.68 cw(c1694.32,4890.68) pad.10@1655.91,4929.09 ; v1(1640,4405) pad.10 ; pad.24 2800,2045 ; pad.24@2760.83,2027.05 cw(c2800,1993.3) 2800,2045 ; pad.24@2760.83,2062.95 ccw(c2800,2096.7) 2800,2045 ; pad.25@2982.5,1835 ccw(c2916.11,1835) 2963.05,1881.95 ccw(c3010,1928.89) pad.25@3010,1862.5 ; pad.25 2800,2045 ; pad.29 4560,4935 pad.26 ; pad.29@4199.45,4915.55 cw(c4246.39,4868.61) 4246.39,4935 cw(c4246.39,5001.39) pad.29@4199.45,4954.45 ; C5.2@4460,2535 C5.2 ; pad.26@4587.5,4985 cw(c4533.18,4985) 4571.59,4946.59 cw(c4610,4908.18) pad.26@4610,4962.5 ; pad.31 pad.30@4985,2935 ; pad.31@4675.91,2919.09 cw(c4714.32,2880.68) 4714.32,2935 cw(c4714.32,2989.32) pad.31@4675.91,2950.91 ; 4897.4,2935 cw(c4897.4,2817.4) pad.30@4980.55,2900.55 ; 4933.61,2935 cw(c4933.61,2853.61) pad.30@4991.16,2911.16
  Top Layer w20: v1@1523.06,3506.97 ccw(c1494.24,3560) 1552.12,3542.88 ccw(c1610,3525.76) v1@1556.97,3496.94 ; v1(1535,3485) pad.11 ; pad.11@1618.03,3828.06 cw(c1565,3799.24) 1622.88,3782.12 cw(c1680.76,3765) pad.11@1651.94,3818.03 ; pad.18@4170.96,3934.24 ccw(c4136.81,3968.89) 4185.46,3968.54 ; v1@4172.2,4597.45 cw(c4128.95,4554.82) 4189.67,4554.38 ; pad.18@4185.11,3920 4190.11,4615 v1@4190.14,4619.93 ; 4185.45,3968.02 ccw(c4233.37,3967.68) pad.18@4199.24,3934.04 ; 4189.68,4554.91 cw(c4249.66,4554.47) v1@4207.55,4597.2
  Bottom Layer w15: C4.1@960,3910 cw(c960,3837.57) 1011.21,3888.79 cw(c1062.43,3940) C4.1@990,3940 ; C4.1 1081.5,3818.5 1081.5,3765.11 1166.61,3680 USB.1 1345,3680 ; USB.1@1252.32,3662.32 ccw(c1209.64,3619.64) 1209.64,3680 ccw(c1209.64,3740.36) USB.1@1252.32,3697.68 ; USB.1@1308.84,3663.56 cw(c1345,3632.01) 1345,3680 ; USB.1@1308.84,3696.44 ccw(c1345,3727.99) 1345,3680 ; U2.16@1442.32,4737.68 ccw(c1399.64,4780.36) 1460,4780.36 ccw(c1520.36,4780.36) U2.16@1477.68,4737.68 ; U2.16 1460,4845 pad.10 ; 1484.52,3540.48 cw(c1429.04,3485) v1@1507.5,3485 ; 1496.59,3528.41 ccw(c1535,3566.82) v1@1535,3512.5 ; 1510.13,3514.87 cw(c1480.25,3485) v1@1522.5,3485 ; v1@1535,3457.5 cw(c1535,3379.04) 1590.48,3434.52 ; v1@1535,3472.5 cw(c1535,3430.25) 1564.87,3460.13 ; v1@1562.5,3485 ccw(c1616.82,3485) 1578.41,3446.59 ; pad.10@1618.37,4951.18 cw(c1566.14,4966.1) 1592.52,4918.62 cw(c1618.9,4871.14) pad.10@1633.82,4923.37 ; pad.11@1620.55,3859.45 ccw(c1573.61,3906.39) 1640,3906.39 ccw(c1706.39,3906.39) pad.11@1659.45,3859.45 ; v1@1620.55,4385.55 cw(c1573.61,4338.61) 1640,4338.61 cw(c1706.39,4338.61) v1@1659.45,4385.55 ; pad.11 v1(1640,4405) ; R12.2@1735,3260 ccw(c1662.57,3260) 1713.79,3311.21 ccw(c1765,3362.43) R12.2@1765,3290 ; R11.2@1743.79,3038.79 cw(c1692.57,2987.57) 1765,2987.57 cw(c1837.43,2987.57) R11.2@1786.21,3038.79 ; R11.2@1743.79,3081.21 ccw(c1692.57,3132.43) 1765,3132.43 ccw(c1837.43,3132.43) R11.2@1786.21,3081.21 ; R12.2@1743.79,3238.79 cw(c1692.57,3187.57) 1765,3187.57 cw(c1837.43,3187.57) R12.2@1786.21,3238.79 ; 1765,2908.28 ccw(c1833.28,2908.28) R10.2 ; 1765,2944.5 ccw(c1869.5,2944.5) R10.2@1795.61,2870.61 ; 1765,2980.71 ccw(c1905.71,2980.71) R10.2@1806.21,2881.21 ; R10.2@1785,2830 cw(c1785,2757.57) 1836.21,2808.79 cw(c1887.43,2860) R10.2@1815,2860 ; U3.1@2002.32,2357.68 ccw(c1959.64,2400.36) 2020,2400.36 ccw(c2080.36,2400.36) U3.1@2037.68,2357.68 ; U3.1 2020,2625 2010.07,2634.93 ; 2658.91,1983.91 cw(c2740,1902.82) pad.24@2740,2017.5 ; 2684.52,2009.52 cw(c2740,1954.04) pad.24@2740,2032.5 ; 2707.2,2032.2 ccw(c2694.39,2045) pad.24@2712.5,2045 ; pad.24@2730,2055 2535,1860 1085,1860 1005,1940 1005,2395 1244.93,2634.93 2010.07,2634.93 ; pad.24 2812.35,2117.35 4269.28,2117.35 4352.93,2201 4352.93,2425 ; pad.24@2740,2072.5 ccw(c2740,2138.89) 2786.95,2091.95 ccw(c2833.89,2045) pad.24@2767.5,2045 ; pad.25 4495,1835 5000,2340 5000,4815 4847.25,4967.75 ; pad.25@3029.45,1815.55 cw(c3076.39,1768.61) 3076.39,1835 cw(c3076.39,1901.39) pad.25@3029.45,1854.45 ; pad.29@4160.55,4915.55 cw(c4113.61,4868.61) 4180,4868.61 cw(c4246.39,4868.61) pad.29@4199.45,4915.55 ; v1@4170.55,4634.45 ccw(c4147.75,4657.25) 4180,4657.25 ; v1@4178.48,4639.97 ccw(c4166.55,4665.8) 4193.25,4655.97 ; v1@4180,4620 4181.62,4624.4 4215,4715 U1.11 ; v1@4180,4625 pad.29 ; 4180,4669.32 ccw(c4244.32,4669.32) v1@4198.84,4623.84 ; 4180,4705.53 ccw(c4280.53,4705.53) v1@4209.45,4634.45 ; pad.18 U1.20 ; 4198.48,4670.16 ccw(c4257.27,4648.5) v1@4201.19,4620.57 ; pad.18@4200.91,3904.09 cw(c4239.32,3865.68) 4239.32,3920 cw(c4239.32,3974.32) pad.18@4200.91,3935.91 ; 4210.49,4702.77 ccw(c4300,4669.79) v1@4214.62,4627.26 ; U1.11@4297.5,4820 cw(c4243.18,4820) 4281.59,4781.59 cw(c4320,4743.18) U1.11@4320,4797.5 ; U1.20@4304.09,3904.09 ccw(c4265.68,3865.68) 4265.68,3920 ccw(c4265.68,3974.32) U1.20@4304.09,3935.91 ; U0.40@4375,2725 cw(c4314.64,2725) 4357.32,2682.32 cw(c4400,2639.64) U0.40@4400,2700 ; U0.40 4352.93,2677.93 4352.93,2425 ; 4411.71,2483.78 ccw(c4355.49,2540) C5.2@4435,2540 ; 4430.87,2502.93 cw(c4460,2473.8) C5.2@4460,2515 ; 4437.32,2509.39 ccw(c4406.71,2540) C5.2@4450,2540 ; C5.2 4460,2532.07 4352.93,2425 ; pad.26 4830,4985 4847.25,4967.75 ; pad.26@4625.91,4969.09 cw(c4664.32,4930.68) 4664.32,4985 cw(c4664.32,5039.32) pad.26@4625.91,5000.91 ; C3.1@4638.79,3018.79 cw(c4587.57,2967.57) 4660,2967.57 cw(c4732.43,2967.57) C3.1@4681.21,3018.79 ; pad.31@4644.09,2919.09 cw(c4605.68,2880.68) 4660,2880.68 cw(c4714.32,2880.68) pad.31@4675.91,2919.09 ; pad.31@4644.09,2950.91 ccw(c4605.68,2989.32) 4660,2989.32 ccw(c4714.32,2989.32) pad.31@4675.91,2950.91 ; C3.1 4660,2800 pad.3@4710,2780 ; pad.3@4686.2,2772.18 ccw(c4643.28,2758.01) 4660.07,2799.97 ccw(c4676.82,2841.84) pad.3@4698.15,2802.11 ; 4840,4975 4847.25,4967.75 ; pad.30@4980.55,2900.55 cw(c4933.61,2853.61) 5000,2853.61 cw(c5066.39,2853.61) pad.30@5019.45,2900.55 ; pad.30@4980.55,2939.45 ccw(c4933.61,2986.39) 5000,2986.39 ccw(c5066.39,2986.39) pad.30@5019.45,2939.45 ; 1345,3680 R12.2 R11.2 1765,2880 R10.2 ; R10.2 2010.07,2634.93
  other v1: 4190,4615
pads on no net: U0.29 U0.30 U0.31 U0.32 U0.33 U0.34 U0.35 U0.36 U0.37 U0.38 U0.39 U2.7 U2.9 U2.10 U2.11 USB.0 USB.2 USB.3

## Polygon pours and split planes (outlines as drawn)
GND on Bottom Layer "Component Side-No Net" (hatched 45Degree grid 20 track 8, remove dead copper): 685,5245 5210,5245 5215,5250 5190,5225 5190,1650 690,1650 695,1655 695,5235 685,5235

## Keep-outs
Keep-Out Layer:
  lines w10: 790,5235 5165,5235 ; 795,5235 685,5235 690,5105 690,1650 5190,1650 5200,5235 5155,5235

## Other copper
Bottom Layer:
  text "SQ Design" at 1735,3945 h60
  text "SQ Design" at 4610,1780 h60

## Silkscreen, mask and mechanical layers (free items; w line width, h text height)
Top Overlay:
  lines w8: 4730,2650 cw(c4685,2720) 4730,2790 4730,2650
  lines w10: 1840,2091.02 1487.09,2091.02 1475.28,2091.02 1473.86,2092.44 1473.86,2269.61 1485.67,2269.61 1840,2269.61 ; 1867.56,2092.44 ccw(c1780.94,2179.05) 1867.56,2265.67